# Altium PCB Shank2.0 PCB.PcbDoc
Units mm, origin at the board's own origin, x right, y up, seen from the top; angles counter-clockwise.
Board outline 78.23 x 87 mm, 2 copper layers (Top Layer, Bottom Layer); 81 components, 74 nets, 350 pads, 63 vias.
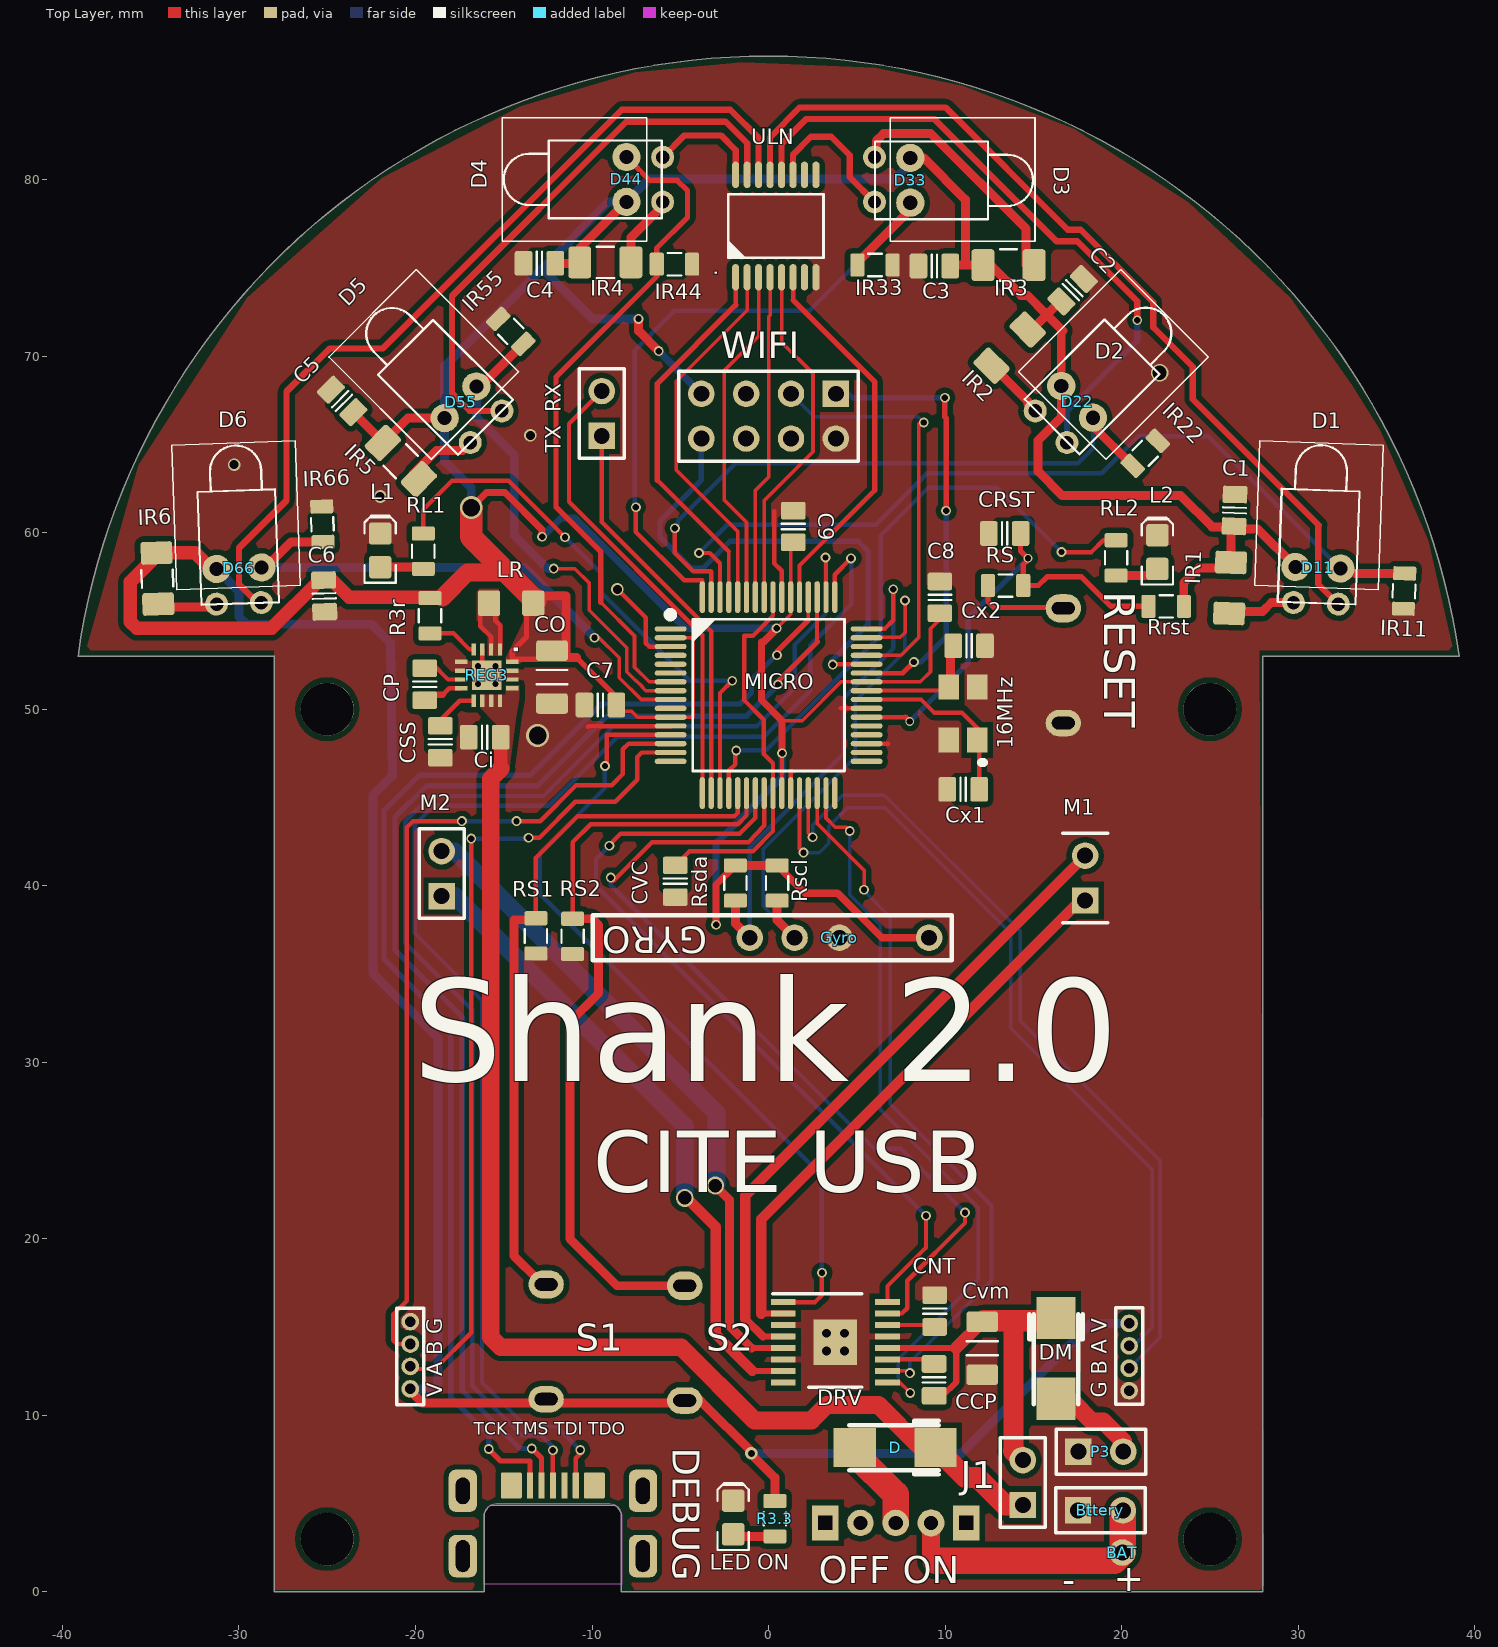
[diagram p0: Top Layer view]
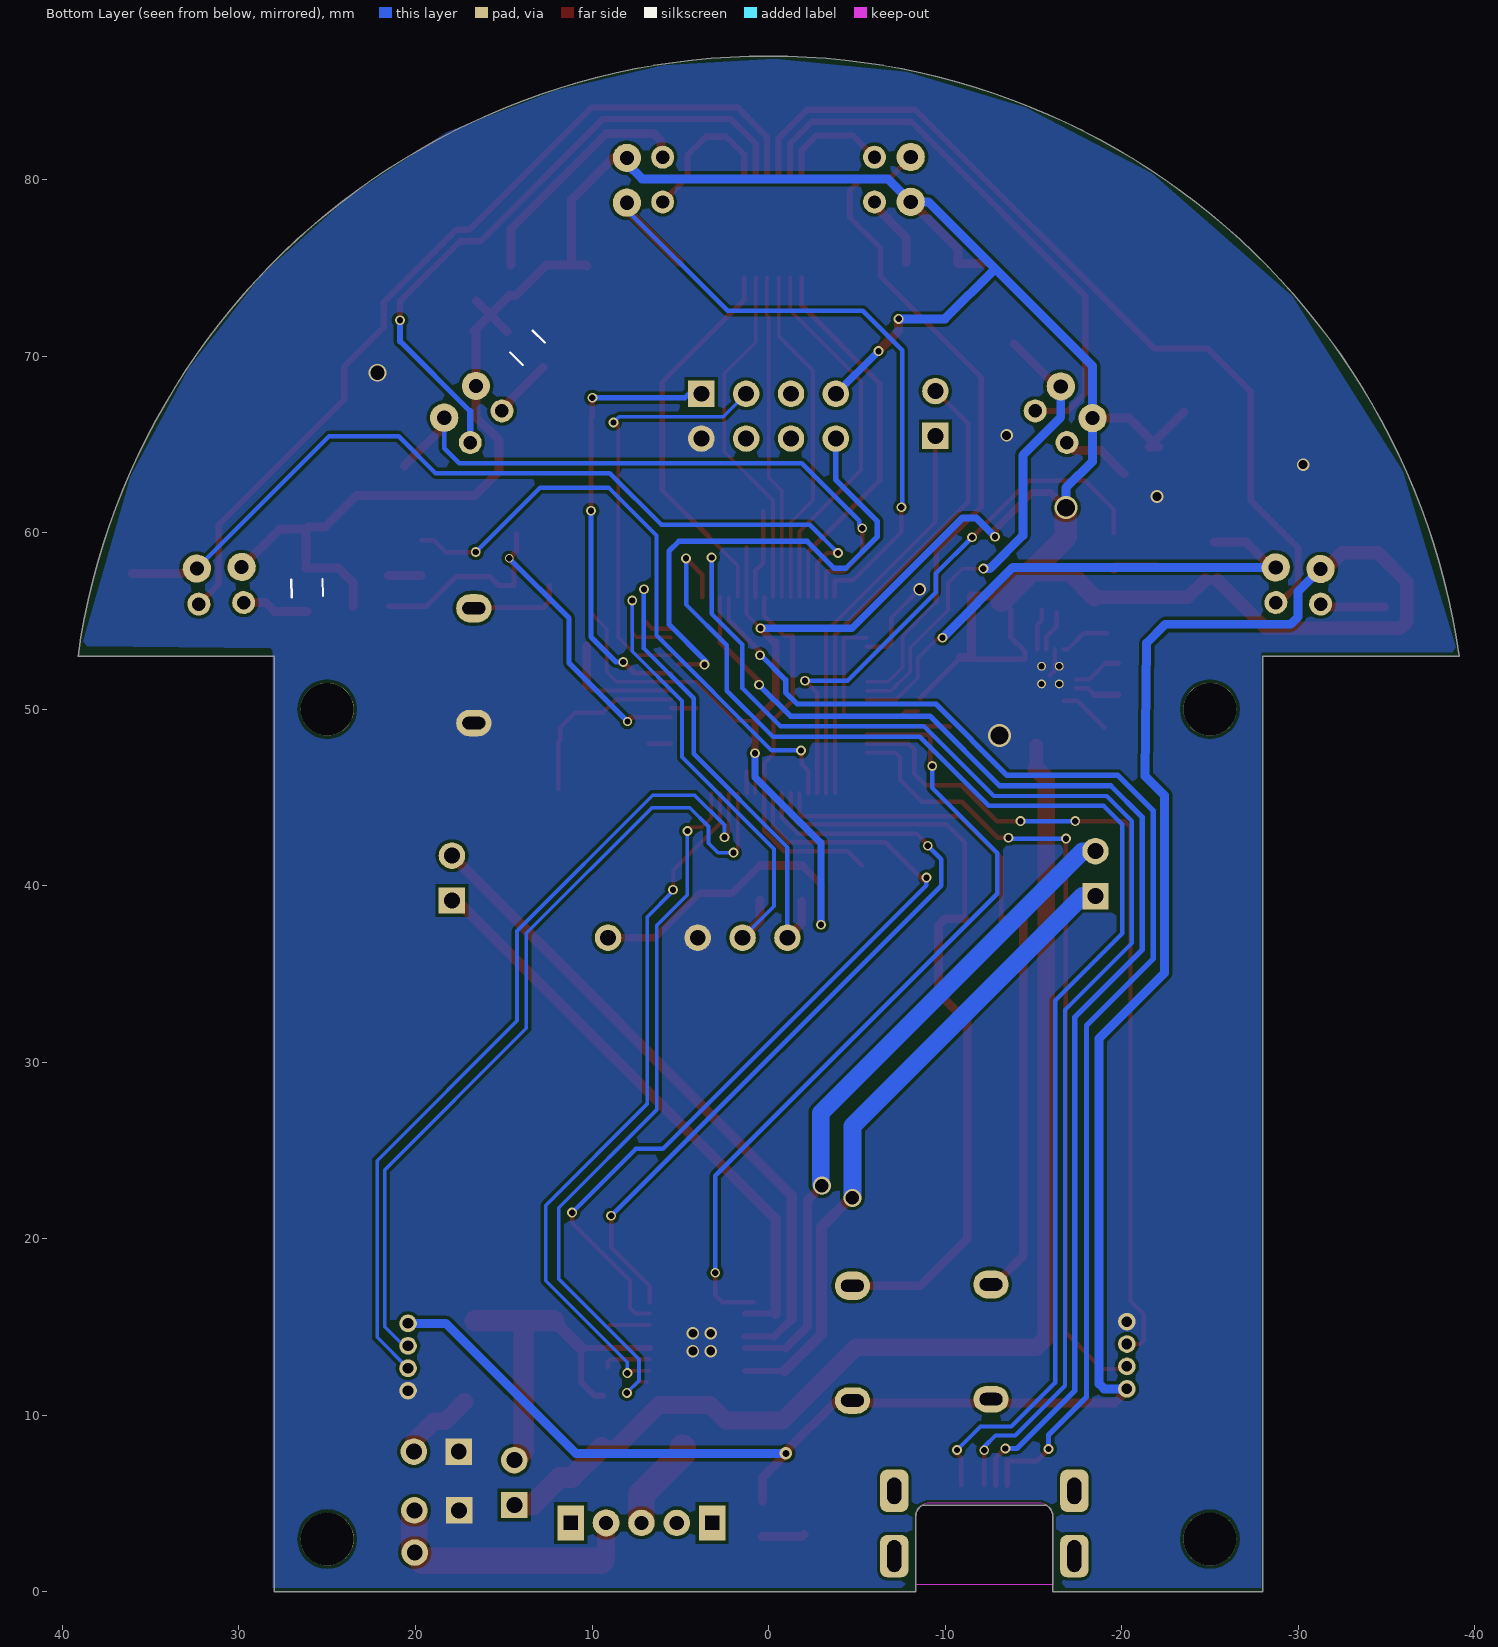
[diagram p1: Bottom Layer view, seen from below]

## Layer stack, top to bottom
Top Solder: solder mask 0.0102, Solder Resist, Dk 3.5
Top Layer: signal copper 0.0356
Dielectric 1: dielectric 0.32, FR-4, Dk 4.8
Bottom Layer: signal copper 0.0356
Bottom Solder: solder mask 0.0102, Solder Resist, Dk 3.5

## Board outline
-28,0 -28,53 -39.1,53 -39.115,53.002 cw(c0,47.5) 39.115,53.002 39.1,53 28,53 28,0 -8.338,0.025 -8.338,4.437 -8.419,4.632 -8.483,4.715 -8.547,4.799 -8.714,4.927 -12.421,4.927 -15.721,4.927 -15.888,4.799 -15.952,4.715 -16.016,4.632 -16.097,4.437 -16.097,0

## Design rules (kind name [scope] priority, off if disabled: settings)
Clearance Clearance_1 [InNamedPolygon('GND TOP')] p1: gap=0.3
Clearance Clearance_Polygon [(InNamedPolygon('GND TOP') AND InPolygon AND InNamedPolygon('GND BOT')) vs InPolygon] p2: gap=0.356
Clearance [All] p3: gap=0.178
ComponentClearance [All] p1 off: gap=0 collisioncheckmode=3 verticalgap=2540 showdistances=FALSE
HoleToHoleClearance [All] p1: gap=0.3 allowstackedmicrovias=TRUE
MinimumSolderMaskSliver [All] p1: minsoldermaskwidth=0
PlaneClearance [All] p1: clearance=1
PlaneConnect [All] p1: planeconnectstyle=Direct reliefexpansion=0.508 reliefentries=4 reliefconductorwidth=0.8 reliefairgap=0.254
PolygonConnect [All] p1: connectstyle=Direct reliefconductorwidth=0.8 reliefentries=4 polygonreliefangle="90 Angle" airgapwidth=0.254
RoutingCorners [All] p1: cornerstyle=Round minsetback=5 maxsetback=2.54
RoutingTopology RoutingTopology_1 [All] p1: topology=Shortest
RoutingVias [All] p1: holewidth=0.6 width=0.8 viastyle="Through Hole" minholewidth=0.254 minwidth=0.381 maxholewidth=1 maxwidth=1.5
SMDNeckDown [All] p1: percent=150.000
SolderMaskExpansion [All] p1: expansion=0.1
Width [All] p1: maxlimit=2.5 minlimit=0.2 preferedwidth=0.3
23 further rules are at their usual default settings.

## Components (designator, comment, footprint, x,y, rotation, side; value= is the part's Value field where it differs from the comment)
16MHz "Component_1" 16Mhz 11.811,48.26 r90 top
BAT "TESTPOINT_LEAD" THP_D46_T80_B80 20.041,2.235 r0 top
Bttery "Header 2" HDR1X2 17.526,4.623 r0 top
C1 "approved sub OK" CAPC2012X135N 26.391,61.265 r268 top
C2 "approved sub OK" CAPC2012X135N 17.221,73.736 r225 top
C3 "approved sub OK" CAPC2012X135N 9.389,75.108 r0 top
C4 "approved sub OK" CAPC2012X135N -12.979,75.26 r0 top
C5 "approved sub OK" CAPC2012X135N -24.155,67.462 r315 top
C6 "approved sub OK" CAPC2012X135N -25.171,56.413 r92 top
C7 "approved sub OK" CAPC2012X135N -9.525,50.241 r0 top
C8 "approved sub OK" CAPC2012X135N 9.703,56.337 r270 top
C9 "approved sub OK" CAPC2012X135N 1.397,60.35 r270 top
CCP "approved sub OK" CAPC2012X135N 9.373,12.014 r270 top
Ci "approved sub OK" CAPC2012X135N -16.078,48.412 r180 top
CNT "approved sub OK" CAPC2012X135N 9.406,15.911 r90 top
CO "22u" CAPC3216X180N -12.268,51.816 r270 top
CP "approved sub OK" CAPC2012X135N -19.474,51.415 r270 top
CRST "approved sub OK" CAPC2012X135N 13.374,59.956 r180 top
CSS "approved sub OK" CAPC2012X135N -18.593,48.158 r270 top
CVC "approved sub OK" CAPC2012X135N -5.283,40.259 r270 top
Cvm "10µ" CAPC3216X175N 12.099,13.803 r270 top (schematic designator CVM)
Cx1 "approved sub OK" CAPC2012X135N 11.024,45.466 r0 top
Cx2 "approved sub OK" CAPC2012X135N 11.354,53.594 r180 top
D "DIODE_SCHOTTKY_10MQ100NPBF" Schottky 4.572,6.909 r0 top
D1 "LED1" LED-v3.0 31,56 r358 top
D2 "LED1" LED-v3.0 16,66 r315 top
D3 "LED1" LED-v3.0 6,80 r270 top
D4 "LED1" LED-v3.0 -6,80 r90 top
D5 "LED1" LED-v3.0 -16,66 r45 top
D6 "LED1" LED-v3.0 -30,56 r2 top
D11 "LED0" LED-1 31.115,58.014 r88 top
D22 "LED0" LED-1 17.475,67.412 r45 top
D33 "LED0" LED-1 8.026,79.959 r0 top
D44 "LED0" LED-1 -8.052,80.01 r180 top
D55 "LED0" LED-1 -17.45,67.386 r135 top
D66 "LED0" LED-1 -29.997,57.988 r92 top
DEBUG "USB Micro Type B (recommended if hand soldering)" USB_Micro-B_FCI_SMD -12.217,0.432 r0 top
DM "Low Ir" Schottky 17.551,10.643 r90 top
DRV "DRV8833PWPR" PWP0016C_N 3.785,14.148 r0 top
"G B A V" "MHDR1X6" "Header Encoder" 20.422,11.405 r90 top
Gyro "Header 8" "Header Gyroscope" 9.093,37.059 r180 top
IR1 "Thick Film" RESC3216N_ZERO 26.137,56.871 r88 top
IR2 "Thick Film" RESC3216N_ZERO 13.653,70.482 r45 top
IR3 "Thick Film" RESC3216X70N 13.589,75.159 r0 top
IR4 "Thick Film" RESC3216X70N -9.246,75.311 r0 top
IR5 "Thick Film" RESC3216X70N -20.828,64.059 r315 top
IR6 "Thick Film" RESC3216X70N -34.62,57.404 r272 top
IR11 "Thick Film" RESC2012X70N 35.992,56.693 r268 top
IR22 "Thick Film" RESC2012X70N 21.336,64.491 r45 top
IR33 "Thick Film" RESC2012X70N 6.026,75.159 r0 top
IR44 "Thick Film" RESC2012X70N -5.334,75.209 r0 top
IR55 "Thick Film" RESC2012X70N -14.605,71.399 r135 top
IR66 "Thick Film" RESC2012X70N -25.273,60.477 r92 top
J1 "Header 2" HDR1X2 14.402,4.928 r90 top
L1 "Red" LED-0805-K -22,59 r90 top
L2 "Red" LED-0805-K 22.022,58.903 r90 top
"LED ON" "Red" LED-0805-K -2.007,4.216 r90 top
LR "470n" INDM2520X190N -14.58,56.007 r0 top
M1 "Header 2" HDR1X2 17.932,39.167 r90 top
M2 "Header 2" HDR1X2 -18.517,39.421 r90 top
MICRO "TM4C123GH6PMT7R" LQFP50P1200X1200X160-64 0,50.8 r0 top
"OFF ON" "Header 3" "SW ON-ON" 3.2,3.912 r0 top
P3 "Header 2" HDR1X2 17.551,7.95 r0 top
R3.3 "Thick Film" RESC2012X70N 0.356,4.152 r270 top
R3r "Thick Film" RESC2012X70N -19.177,55.296 r270 top
REG3 "TPS62091" TPS62091 -15.961,51.935 r270 top
RESET "TS-1143S-WP" "Switche GP" 16.695,49.219 r90 top
RL1 "Thick Film" RESC2012X70N -19.558,58.953 r270 top
RL2 "Thick Film" RESC2012X70N 19.685,58.572 r270 top
Rrst "Thick Film" RESC2012X70N 22.52,55.828 r180 top
RS "Thick Film" RESC2012X70N 13.425,57.004 r0 top
RS1 "Thick Film" RESC2012X70N -13.183,37.16 r90 top
RS2 "Thick Film" RESC2012X70N -11.1,37.135 r270 top
Rscl "Thick Film" RESC2012X70N 0.483,40.157 r270 top
Rsda "Thick Film" RESC2012X70N -1.88,40.157 r270 top
S1 "TS-1143S-WP" "Switche GP" -12.598,10.922 r90 top
S2 "TS-1143S-WP" "Switche GP" -4.75,10.846 r90 top
"TX  RX" "Header 2" HDR1X2 -9.449,65.481 r90 top
ULN "Component_1" TSSOP65P640X120-16N 0.409,77.368 r90 top
"V A B G" "MHDR1X6" "Header Encoder" -20.295,15.316 r270 top
WIFI "Header 4X2" HDR2X4 3.81,67.869 r180 top

## Footprints (in the part's own frame and the unit in brackets; to place one, negate y for a bottom-side part, rotate by r counter-clockwise, add the part's x,y. Pads: shape width x height; smd on the part's side, far side on the other; paste and mask are expansions set on the pad)
16Mhz [mm]
  rect 1.4x1.15 smd: 1(0,0) 2(3,0) 3(3,1.6) 4(0,1.6)
  silkscreen extent -1.27,-0.38 -1.27,-0.25
CAPC2012X135N [mm] "Chip Capacitor, Body 2.0x1.2mm, EIA 0805, IPC Medium Density"
  round 0.254 on Mech15: 0(0,0)
  rrect25% 1x1.4 smd: 1(-0.9,0) 2(0.9,0)
  Top Layer pour cut-out: -0.675,0.7 -0.475,0.9 0.475,0.9 0.675,0.7 0.675,-0.7 0.475,-0.9 -0.475,-0.9 -0.675,-0.7
  silkscreen extent -0.15,-0.65 0.15,0.65, body extent -1.1,-0.72 1.1,0.73, height 1.34
CAPC3216X175N [mm] "Chip Capacitor, Body 3.2x1.6mm, 1.75mm H, EIA 1206, IPC Medium Density"
  round 0.508 on Mech15: 0(0,0)
  rrect25% 1.15x1.8 smd: 1(-1.5,0) 2(1.5,0)
  silkscreen extent -0.4,-0.88 0.4,0.88, body extent -1.7,-0.9 1.7,0.9, height 1.75
CAPC3216X180N [mm] "Chip Capacitor, Body 3.2x1.6mm, 1.8mm H, EIA 1206, IPC Medium Density"
  round 0.508 on Mech15: 0(0,0)
  rrect25% 1.15x1.8 smd: 1(-1.5,0) 2(1.5,0)
  silkscreen extent -0.4,-0.88 0.4,0.88, body extent -1.7,-0.9 1.7,0.9, height 1.8
HDR1X2 [mm] "Connector; Header; 2 Position"
  rect 1.5x1.5 hole 0.9: 1(0,0)
  round 1.5 hole 0.9: 2(2.54,0)
  silkscreen extent -1.27,-1.27 3.81,1.27
HDR2X4 [mm] "Connector; Header; 4x2 Position"
  rect 1.5x1.5 hole 0.9: 1(0,0)
  round 1.5 hole 0.9: 2(0,2.54) 3(2.54,0) 4(2.54,2.54) 5(5.08,0) 6(5.08,2.54) 7(7.62,0) 8(7.62,2.54)
  silkscreen extent -1.27,-1.27 8.89,3.81
"Header Encoder" [mm] "Connector; Header; 6 Position"
  round 1 hole 0.6: 1(0,0) 2(1.27,0) 3(2.54,0) 4(3.81,0)
  silkscreen extent -0.76,-0.76 4.7,0.76
"Header Gyroscope" [mm] "Connector; Header; 8 Position"
  round 1.5 hole 0.9: 1(0,0) 3(5.08,0) 4(7.62,0) 5(10.16,0)
  silkscreen extent -1.27,-1.27 19.05,1.27
INDM2520X190N [mm] "Inductor, molded body 2.5x2.0mm"
  round 0.508 on Mech15: 0(0,0)
  rrect20% 1.25x1.45 smd: 1(-1.25,0) 2(1.25,0)
  Top Layer pour cut-out: -0.7,1 0.7,1 0.7,-1 -0.7,-1
  body extent -1.25,-1 1.25,1, height 1.79
LED-1 [mm] "LED; 2 Leads"
  round 1.6 hole 0.8: 1(0,1.27) 2(0,-1.27)
  silkscreen extent -2,-2.2 6.95,2.2
LED-0805-K [mil]
  round 20 on Mech15: 0(0,0)
  rrect25% 50x50 smd: A(-37.5,0) K(37.5,0)
  Top Layer pour cut-out: -15,30 15,30 15,-30 -15,-30
  silkscreen extent -73,-35 77,35, body extent -39,-25 39,25, height 31
LED-v3.0 [mm] "LED; 2 Leads"
  round 1.3 hole 0.762: 1(-1.27,0) 2(1.27,0)
  silkscreen extent -3.5,0.9 3.5,9.09
LQFP50P1200X1200X160-64 [mm] "Thin Quad Flat Pack, 64 pins, 0.5mm pitch, 12mm lead span, body 10x10mm, 0.1mm body height, max tolerances, IPC Medium Density"
  round 1 on Mech15: 0(0,0)
  oval 1.8x0.3 smd: 1(-5.55,3.75) 2(-5.55,3.25) 3(-5.55,2.75) 4(-5.55,2.25) 5(-5.55,1.75) 6(-5.55,1.25) 7(-5.55,0.75) 8(-5.55,0.25) 9(-5.55,-0.25) 10(-5.55,-0.75) 11(-5.55,-1.25) 12(-5.55,-1.75) 13(-5.55,-2.25) 14(-5.55,-2.75) 15(-5.55,-3.25) 16(-5.55,-3.75) 33(5.55,-3.75) 34(5.55,-3.25) 35(5.55,-2.75) 36(5.55,-2.25) 37(5.55,-1.75) 38(5.55,-1.25) 39(5.55,-0.75) 40(5.55,-0.25) 41(5.55,0.25) 42(5.55,0.75) 43(5.55,1.25) 44(5.55,1.75) 45(5.55,2.25) 46(5.55,2.75) 47(5.55,3.25) 48(5.55,3.75)
  oval 0.3x1.8 smd: 17(-3.75,-5.55) 18(-3.25,-5.55) 19(-2.75,-5.55) 20(-2.25,-5.55) 21(-1.75,-5.55) 22(-1.25,-5.55) 23(-0.75,-5.55) 24(-0.25,-5.55) 25(0.25,-5.55) 26(0.75,-5.55) 27(1.25,-5.55) 28(1.75,-5.55) 29(2.25,-5.55) 30(2.75,-5.55) 31(3.25,-5.55) 32(3.75,-5.55) 49(3.75,5.55) 50(3.25,5.55) 51(2.75,5.55) 52(2.25,5.55) 53(1.75,5.55) 54(1.25,5.55) 55(0.75,5.55) 56(0.25,5.55) 57(-0.25,5.55) 58(-0.75,5.55) 59(-1.25,5.55) 60(-1.75,5.55) 61(-2.25,5.55) 62(-2.75,5.55) 63(-3.25,5.55) 64(-3.75,5.55)
  silkscreen extent -5.75,-4.3 4.3,4.75, body extent -6.1,-6.1 6.1,6.1, height 1.59
PWP0016C_N [mm]
  rect 1.4x0.35 smd paste+0 mask+0.051: 1(-2.95,2.275) 2(-2.95,1.625) 3(-2.95,0.975) 4(-2.95,0.325) 5(-2.95,-0.325) 6(-2.95,-0.975) 7(-2.95,-1.625) 8(-2.95,-2.275) 9(2.95,-2.275) 10(2.95,-1.625) 11(2.95,-0.975) 12(2.95,-0.325) 13(2.95,0.325) 14(2.95,0.975) 15(2.95,1.625) 16(2.95,2.275)
  rect 2.46x2.56 smd paste+0 mask+0.051: 17(0,0)
  silkscreen extent -3.55,-2.55 1.5,2.75
RESC2012X70N [mm] "Chip Resistor, Body 2.0x1.2mm, EIA 0805, IPC Medium Density"
  round 0.254 on Mech15: 0(0,0)
  rrect25% 0.8x1.3 smd: 1(-1,0) 2(1,0)
  Top Layer pour cut-out: -0.725,0.65 -0.525,0.85 0.525,0.85 0.725,0.65 0.725,-0.65 0.525,-0.85 -0.525,-0.85 -0.725,-0.65
  silkscreen extent -0.38,-0.64 0.38,0.64, body extent -1.1,-0.67 1.1,0.68, height 0.69
RESC3216N_ZERO [mm] "Chip Resistor, Body 3.2x1.6mm, 1206, IPC Medium Density"
  round 0.508 on Mech15: 0(0,0)
  rrect25% 1.3x1.8 smd: 1(1.45,0) 2(-1.45,0)
  body extent -1.63,-0.82 1.62,0.83, height 0.69
RESC3216X70N [mm] "Chip Resistor, Body 3.2x1.6mm, EIA 1206, IPC Medium Density"
  round 0.508 on Mech15: 0(0,0)
  rrect25% 1.3x1.8 smd: 1(-1.45,0) 2(1.45,0)
  silkscreen extent -0.51,-0.89 0.51,0.89, body extent -1.62,-0.82 1.63,0.83, height 0.69
Schottky [mm] "JEDEC DO214 variation AC. SMA"
  rect 2.4x2.2 smd: A(0.3,1.27) K(4.88,1.27)
  silkscreen extent 0,-0.25 5.08,2.79
"SW ON-ON" [mm] "Connector; Header; 3 Position"
  round 1.5 hole 0.8: 1(2,0) 2(4,0)
  round 1.524 hole 0.8: 3(6,0)
  rect 1.5x2 hole 0.8 square: GND(0,0) GND(8,0)
"Switche GP" [mm]
  oval 1.5x2 hole 0.7 slot 1.3 at 90 deg: 1(0,0)
  oval 1.6x2 hole 0.7 slot 1.3 at 90 deg: 2(6.5,0)
THP_D46_T80_B80 [mm]
  round 1.5 hole 0.9: 1(0,0)
TPS62091 [mm]
  rect 0.7x0.25 smd mask+0.07: 1(-1.45,0.75) 2(-1.45,0.24) 3(-1.45,-0.25) 4(-1.45,-0.75) 9(1.45,-0.75) 10(1.45,-0.25) 11(1.45,0.25) 12(1.45,0.75)
  round 0.5 hole 0.35: 3(0.5,-0.5) 14(-0.5,0.5) 14(-0.5,-0.5) 14(0.5,0.5)
  rect 0.25x0.7 smd mask+0.07: 5(-0.75,-1.45) 6(-0.25,-1.45) 7(0.25,-1.45) 8(0.75,-1.45) 13(0.75,1.45) 14(0.25,1.45) 15(-0.25,1.45) 16(-0.75,1.45)
  rect 1.68x1.68 smd mask+0.07: 14(0,0)
TSSOP65P640X120-16N [mm] "TSSOP, 16 Leads, Body 5.1x4.5mm (max), Pitch 0.65mm, IPC Medium Density"
  round 0.508 on Mech15: 0(0,0)
  oval 1.5x0.4 smd paste-0.051: 1(-2.9,2.275) 2(-2.9,1.625) 3(-2.9,0.975) 4(-2.9,0.325) 5(-2.9,-0.325) 6(-2.9,-0.975) 7(-2.9,-1.625) 8(-2.9,-2.275) 9(2.9,-2.275) 10(2.9,-1.625) 11(2.9,-0.975) 12(2.9,-0.325) 13(2.9,0.325) 14(2.9,0.975) 15(2.9,1.625) 16(2.9,2.275)
  silkscreen extent -1.8,-2.7 1.8,2.7, body extent -3.25,-2.55 3.25,2.55, height 1.2
USB_Micro-B_FCI_SMD [mm]
  round 0.508 on Mech15: 0(0,0)
  rrect20% 0.35x1.5 smd: 1(-1.3,5.6) 2(-0.65,5.6) 3(0,5.6) 4(0.65,5.6) 5(1.3,5.6)
  rrect50% 1.6x2.4 hole 0.8 slot 1.8 at 90 deg: SH(-5.1,1.6) SH(5.1,1.6)
  rrect50% 1.6x2.4 hole 0.8 slot 1.5 at 90 deg: SH(-5.1,5.3) SH(5.1,5.3)
  rrect20% 1.2x1.5 smd: SH(-2.35,5.6) SH(2.35,5.6)
  Keep-Out Layer board cut-out: -3.9,0 -3.9,3.797 -3.839,4.103 -3.666,4.362 -3.406,4.536 -3.1,4.597 -3.1,4.597 3.1,4.597 3.406,4.536 3.666,4.362 3.839,4.103 3.9,3.797 3.9,3.797 3.9,0
  body extent -5.35,-21.58 5.35,5.8, height 4.67

## Part data
BAT: "TEST POINT"
Bttery J1 M1 M2 P3 "TX  RX": "Header, 2-Pin"
C1 C2 C3 C4 C5 C6 C7 C8 C9 Ci CP CSS CVC Cx1 Cx2: library part CAPC_10u_0805_10V, "Capacitor SMD Cer 10uF 10% 10V X5R 0805"
CCP CRST: library part CAPC_1u_0805_X7R_16V_10%, "Capacitor SMD Cer 1uF 10% 16V X7R 0805"
CNT: library part CAPC_2u2_0805, "Capacitor SMD Cer 2.2uF 10% 16V X7R 0805"
CO: library part CAPC_100n_1206_NP0_50V_5%, "Capacitor SMD Cer 100nF 1206 NP0 50V 5%"
Cvm: library part CAPT_10u_6032_16V, "Capacitor SMD Tantalum 10uF 20% 16V EIA 6032-28"
D: "Diode Schottky SMD 100V 2A SMA"
D1 D2 D3 D4 D5 D6: "Typical RED GaAs LED"
D11 D22 D33 D44 D55 D66: "Typical INFRARED GaAs LED"
DEBUG: library part USB_Micro_TypeB_FCI, "Connector SMD-THD USB Micro Type B middle mount"
DM: library part DIODE_SCHOTTKY_40V_30mA_SOD-523F, "Diode Schottky SMD 40V 30mA SOD-523F"
DRV MICRO: "Imported"
"G B A V" "V A B G": "Header, 6-Pin"
Gyro: "Header, 8-Pin"
IR1 IR2 IR3 IR4 IR5 IR6 IR11 IR22 IR33 IR44 IR55 IR66 R3.3 R3r RL1 RL2 Rscl Rsda: library part RES_2K2_0805_1%, "Resistor SMD chip 2.2k Ohm 0.125W 1% 0805"
L1 L2 "LED ON": library part LED_SMD_Red_0805_6mcd, "LED 0805 SMD Red 6mcd 621nm"
LR: library part INDC_150n_1008, "Inductor SMD chip 150nH 1008"
"OFF ON": "Header, 3-Pin"
RESET S1 S2: library part SW_SMD_PB_4.3mm, "Switch SMD Tact 4.3mm Stem"
Rrst RS: library part RES_205K_0805_1%, "Resistor SMD chip 205k Ohm 0.125W 1% 0805"
RS1 RS2: library part RES_1K5_0805_1%, "Resistor SMD chip 1.5k Ohm 0.125W 1% 0805"
WIFI: "Header, 4-Pin, Dual row"

## Free pads (board coordinates)
  round 3 hole 3 unplated paste+0 mask+0: 1(-25,3) 1(-25,50) 1(25,3) 1(25,50)

## Via types
v1: diameter 0.559, hole 0.356, Top Layer to Bottom Layer, 47 vias
v2: diameter 0.711, hole 0.508, Top Layer to Bottom Layer, 8 vias
v3: diameter 0.5, hole 0.35, Top Layer to Bottom Layer, 2 vias
v4: diameter 1.016, hole 0.762, Top Layer to Bottom Layer, 2 vias
v5: diameter 1.3, hole 1, Top Layer to Bottom Layer, 2 vias
v6: diameter 0.7, hole 0.4, Top Layer to Bottom Layer, 1 vias
v7: diameter 1, hole 0.8, Top Layer to Bottom Layer, 1 vias

## Nets (pads, with @x,y where several pads share a name; then routed paths per layer and width w, separated by ;. In a path a pad name is that pad's centre, name@x,y a point inside that pad or via, vN(x,y) a via of type N, cw(c..) or ccw(c..) an arc to the next point about the centre after c; other vN are vias at no path point)
3.3V: "G B A V.4" "V A B G.4" C1.2 C2.2 C3.2 C4.2 C5.2 C6.2 C7.2 C8.2 C9.2 CO.1 D11.1 D22.1 D33.1 D44.1 D55.1 D66.1 Gyro.1 IR1.1 IR2.1 IR3.1 IR4.1 IR5.1 IR6.1 LR.2 MICRO.2 MICRO.11 MICRO.26 MICRO.42 MICRO.54 R3.3.1 R3r.1 REG3.16 Rrst.1 Rscl.1 Rsda.1 S1.1 S2.1 WIFI.7 | length 365.8
  Top Layer w0.203: C7.2@-8.484,49.897 -7.773,49.897 -7.426,49.55 MICRO.11 -4.267,49.55 -4.267,54.05 MICRO.2 ; S2.1@-4.902,10.693 S2.1 S2.1@-3.861,10.846 ; v1(0.457,54.585) 1.25,55.377 MICRO.54 C9.2@1.25,59.187 ; MICRO.26 0.75,46.321 ; 0.767,49.347 1.9,49.347 4.103,51.55 MICRO.42 8.599,51.55 9.169,52.121 9.169,54.559 9.924,55.314 C8.2@9.901,55.338
  Top Layer w0.229: 0.75,46.321 0.75,47.524 v1(0.767,47.507)
  Top Layer w0.3: LR.2@-13.71,55.627 -13.71,54.096 -14.511,53.295 -14.511,52.836 -11.12,52.836
  Top Layer w0.305: -10.871,52.934 C7.2@-8.598,50.66
  Top Layer w0.406: v5(-16.842,61.419) -15.979,62.281 -14.935,62.281 -12.827,60.172 v1(-12.827,59.769) ; v1(-2.972,37.795) -2.972,40.065 Rsda.1 ; -0.403,53.8 -0.403,50.517 0.767,49.347 v1(0.767,47.507) ; -0.299,53.8 0.486,54.585 v1(0.457,54.585) ; Rscl.1 2.067,39.573 3.912,39.573 6.426,37.059 Gyro.1
  Top Layer w0.5: Rrst.1 23.52,57.164
  Top Layer w0.508: C6.2@-25.426,57.313 C6.2 C6.2@-24.725,57.313 ; C5.2 -21.535,64.842 -22.082,64.842 -20.435,66.488 D55.1 ; -20.126,11.227 -19.593,10.693 S2.1@-4.902,10.693 ; LR.2 -13.205,56.131 -12.923,56.413 -11.481,56.413 -11.481,52.934 -10.871,52.934 ; C4.2 -10.719,75.26 -10.719,76.073 D44.1 ; v1(-7.366,72.111) -7.366,71.425 v1(-6.223,70.282) ; S2.1@-3.861,10.846 -0.864,7.849 -0.864,7.696 0.356,6.477 R3.3.1 ; Rsda.1 Rscl.1 ; D33.1 8.788,81.229 11.151,78.867 11.151,75.224 11.085,75.159 ; C3.2 10.34,75.159 11.085,75.159 ; IR2.1@14.818,71.409 15.761,72.352 ; C2.2@16.547,73.138 15.761,72.352 ; D22.1@16.577,69.013 D22.1 ; 23.52,57.164 24.344,57.988 IR1.1@26.213,57.988 ; IR1.1@26.197,58.32 C1.2@26.197,60.203 ; D11.1 27.701,60.203 C1.2@26.197,60.203 ; 11.085,75.159 12.589,75.159 14.3,73.447 14.665,73.447 15.761,72.352 ; 15.761,72.352 16.675,71.438 16.577,71.34 D22.1 ; D22.1 16.577,66.539 15.265,65.227 15.265,63.475 16.637,62.103 23.343,62.103 25.121,60.325 26.075,60.325 C1.2@26.197,60.203
  Top Layer w0.762: D66.1@-31.417,57.794 -32.475,58.852 -34.519,58.852 -36.144,57.226 -36.144,54.94 -35.789,54.585 -28.154,54.585 C6.2@-25.426,57.313 ; C6.2@-24.725,57.313 -23.749,56.337 -18.466,56.337
  Top Layer w1.016: -18.466,56.337 -17.064,57.739 -14.666,57.739
  Top Layer w1.27: v5(-16.842,61.419) -16.842,59.768 LR.2@-13.205,56.131
  Bottom Layer w0.203: -2.972,42.443 -2.957,42.428
  Bottom Layer w0.406: v1(-12.827,59.769) -12.824,59.769 -11.76,60.833 -10.973,60.833 -4.724,54.585 v1(0.457,54.585) ; v1(-6.223,70.282) WIFI.7 ; v1(-2.972,37.795) -2.972,42.443 ; -2.957,42.428 0.767,46.152 v1(0.767,47.507)
  Bottom Layer w0.508: D66.1 -29.997,56.675 -29.997,55.245 -29.566,54.813 -22.479,54.813 -21.418,53.752 -21.311,46.228 -22.416,45.124 -22.416,35.05 -18.72,31.354 -18.72,11.793 -19.006,11.506 -20.295,11.506 ; v5(-16.842,61.419) -16.842,62.536 -18.348,64.042 D55.1 -18.348,69.435 -12.827,74.955 ; v1(-7.366,72.111) -9.982,72.111 -12.827,74.955 ; v6(-0.974,7.849) 10.922,7.849 18.288,15.215 20.422,15.215 ; D33.1 8.026,80.899 7.163,80.035 -6.756,80.035 D44.1 -9.042,78.74 -12.827,74.955
ADC1: D11.2 IR11.1 MICRO.62 | length 49.3
  Top Layer w0.25: v1(-3.937,58.852) -3.327,58.852 -2.75,58.274 MICRO.62 ; D11.2 32.963,57.969 33.24,57.692
  Top Layer w0.5: 33.24,57.692 IR11.1
  Bottom Layer w0.25: v1(-3.937,58.852) -2.337,60.452 6.071,60.452 8.992,63.373 18.872,63.373 20.955,65.456 24.898,65.456 D11.2
ADC2: D22.2 IR22.1 MICRO.63 | length 36.4
  Top Layer w0.25: v1(-5.309,60.249) -5.309,58.852 -4.267,57.81 -3.276,57.81 -3.25,57.784 MICRO.63 ; D22.2@18.373,66.039 D22.2
  Top Layer w0.5: D22.2@18.373,66.039 IR22.1
  Bottom Layer w0.25: v1(-5.309,60.249) -5.131,60.427 -5.131,60.681 -1.88,63.932 17.526,63.932 18.373,64.779 D22.2
ADC3: D33.2 IR33.1 MICRO.64 | length 39.9
  Top Layer w0.25: v1(-7.518,61.443) -7.518,60.046 -4.775,57.302 -3.759,57.302 MICRO.64@-3.759,56.359 ; D33.2@8.026,78.283 D33.2
  Top Layer w0.5: IR33.1@5.08,75.336 D33.2@8.026,78.283
  Bottom Layer w0.25: v1@-7.569,61.493 -7.569,70.333 -5.334,72.568 2.311,72.568 8.026,78.283 D33.2
ADC4: D44.2 IR44.1 MICRO.7 | length 38.5
  Top Layer w0.203: -9.5,56.058 -7.595,54.153 -7.595,52.384 -6.761,51.55 MICRO.7
  Top Layer w0.3: -9.5,56.058 -9.5,58.908 -12.04,61.448 -12.04,68.809 -6.334,74.514 IR44.1 -6.334,76.114 -4.597,77.851 -4.597,79.375 -5.182,79.959 -6.731,79.959 D44.2
ADC5: D55.2 IR55.1 MICRO.8 | length 27.2
  Top Layer w0.203: v1(-12.167,57.963) -10.973,57.963 -10.16,57.15 -10.16,55.611 -8.026,53.477 -8.026,52.121 -7.518,51.613 -7.49,51.613 -7.163,51.285 -7.163,51.257 -6.956,51.05 MICRO.8
  Top Layer w0.25: D55.2 D55.2@-16.306,68.284
  Top Layer w0.5: D55.2@-16.306,68.284 IR55.1
  Bottom Layer w0.5: D55.2 -16.552,66.539 -14.402,64.389 -14.402,59.842 -12.522,57.963 v1(-12.167,57.963)
ADC6: D66.2 IR66.1 MICRO.9 | length 31
  Top Layer w0.203: v1(-9.855,54.051) -9.601,54.051 -8.458,52.908 -8.458,51.791 -7.218,50.55 MICRO.9
  Top Layer w0.25: D66.2 D66.2@-28.48,58.033
  Top Layer w0.5: D66.2@-28.48,58.033 -27.034,59.478 IR66.1
  Bottom Layer w0.5: D66.2 -13.837,58.033 v1(-9.855,54.051)
AIN1: DRV.16 MICRO.23 | length 44.9
  Top Layer w0.25: -8.839,42.494 -8.375,42.959 -2.02,42.959 -2.017,42.955 -1.637,42.955 -0.75,43.842 MICRO.23 ; DRV.16 6.735,17.326 8.915,19.507 v1(8.915,21.311)
  Bottom Layer w0.25: v1(-9.017,42.266) -9.777,41.506 -9.777,40.003 v1(8.915,21.311)
AIN2: DRV.15 MICRO.24 | length 47.9
  Top Layer w0.25: v1@-8.788,40.284 -6.604,42.469 -1.14,42.469 -0.25,43.415 MICRO.24 ; DRV.15 7.543,15.773 7.847,16.077 7.847,17.626 11.125,20.904 v1(11.125,21.488)
  Bottom Layer w0.25: v1(-8.941,40.462) -8.941,40.03 5.994,25.095 7.518,25.095 v1(11.125,21.488)
BIN1: DRV.9 MICRO.31 | length 41.2
  Top Layer w0.203: MICRO.31 3.25,43.835 3.778,43.307 4.394,43.307 ; DRV.9@6.883,11.913 7.391,11.913 v1(8.026,11.278)
  Bottom Layer w0.203: v1(4.597,43.104) 4.597,39.497 6.325,37.77 6.325,27.33 11.887,21.768 11.887,17.729 7.341,13.183 7.341,11.963 v1(8.026,11.278)
BIN2: DRV.10 MICRO.30 | length 40.2
  Top Layer w0.203: MICRO.30 2.75,43.529 5.41,40.869 v1(5.41,39.776) ; DRV.10 7.772,12.523 7.95,12.344 v1(8.001,12.395)
  Bottom Layer w0.203: v1(5.41,39.776) 5.41,39.7 6.883,38.227 6.883,27.635 12.624,21.895 12.624,17.628 8.001,13.005 v1(8.001,12.395)
CH_PD: MICRO.45 WIFI.3 | length 24.1
  Top Layer w0.203: MICRO.45 7.495,53.05 8.509,54.064 8.509,66.167 8.585,66.243 v1(8.788,66.243)
  Bottom Layer w0.203: WIFI.3 2.576,66.563 8.468,66.563 v1(8.788,66.243) v1@8.839,66.294
GND: 16MHz.2 16MHz.4 "G B A V.1" "LED ON.K" "V A B G.1" Bttery.1 C1.1 C2.1 C3.1 C4.1 C5.1 C6.1 C7.1 C8.1 C9.1 Ci.2 CNT.2 CO.2 CRST.2 CSS.2 CVC.2 Cvm.2 Cx1.1 Cx2.1 DRV.3 DRV.6 DRV.13 DRV.17 Gyro.3 IR11.2 IR22.2 IR33.2 IR44.2 IR55.2 IR66.2 L1.K L2.K MICRO.3 MICRO.12 MICRO.27 MICRO.35 MICRO.39 MICRO.55 P3.1 REG3.3 REG3.5 REG3.6 REG3.14 REG3.15 RESET.1 RS1.1 RS2.2 ULN.8 WIFI.2 | length 20.4
  Top Layer w0.254: REG3.3@-16.211,53.385 -16.211,52.185 REG3.14@-15.961,51.935 ; -10.249,49.015 -10.214,49.05 MICRO.12 ; v2(-8.56,56.794) -6.96,55.194 -6.96,53.746 -6.763,53.55 MICRO.3 ; 0.31,61.217 0.31,58.276 0.75,57.836 MICRO.55 ; MICRO.27 1.25,46.474 ; 4.098,50.05 MICRO.39 ; MICRO.35 6.777,48.05
  other v2: 3.277,13.64 4.293,13.64 3.277,14.656 4.293,14.656 -22,62.049 -30.277,63.856 -13.487,65.507
  other v5: -13.081,48.514
  other v7: 22.149,69.063
IR1: MICRO.58 ULN.4 | length 18.5
  Top Layer w0.203: MICRO.58 -0.75,62.394 0,63.144 0,72.212 0.102,72.314 0.102,74.451 ULN.4
IR2: MICRO.57 ULN.5 | length 20
  Top Layer w0.203: MICRO.57 -0.25,61.828 2.515,64.592 2.515,69.012 0.734,70.792 ULN.5
IR3: MICRO.53 ULN.6 | length 21.8
  Top Layer w0.203: MICRO.53 1.75,58.138
  Top Layer w0.229: 1.75,58.138 3.404,59.792
  Top Layer w0.254: 1.384,73.176 ULN.6
  Top Layer w0.279: 3.404,59.792 6.022,62.41
  Top Layer w0.3: 1.384,73.176 6.022,68.539 6.022,62.41
IR4: MICRO.61 ULN.1 | length 21.6
  Top Layer w0.203: MICRO.61 -2.25,58.917
  Top Layer w0.241: -6.299,62.967 -2.25,58.917
  Top Layer w0.254: -1.866,72.886 ULN.1
  Top Layer w0.3: -6.299,62.967 -6.299,68.453 -1.866,72.886
IR5: MICRO.60 ULN.2 | length 21.2
  Top Layer w0.203: MICRO.60 -1.75,60.068 -5.232,63.551 -5.232,68.58 -1.216,72.597 ULN.2
IR6: MICRO.59 ULN.3 | length 19.4
  Top Layer w0.203: MICRO.59 -1.25,60.584 -2.515,61.849 -2.515,69.19 -0.566,71.138 ULN.3
L1: MICRO.19 RL1.1 | length 31.5
  Top Layer w0.25: RL1.1 -19.558,61.316 -17.932,62.941 -14.732,62.941 v1(-11.532,59.741) ; MICRO.19 -2.75,50.92 v1(-2.057,51.613)
  Bottom Layer w0.25: v1(-11.532,59.741) -9.474,57.683 -9.474,56.617 -4.47,51.613 v1(-2.057,51.613)
L2: MICRO.20 RL2.1 | length 35.5
  Top Layer w0.25: MICRO.20 -2.25,46.518 -1.88,46.888 -1.88,47.718 v1(-1.83,47.669) ; v1(16.586,58.903) 18.292,58.903 18.962,59.572 RL2.1
  Bottom Layer w0.25: v1(-1.83,47.669) -0.168,47.669 6.35,54.187 6.35,59.842 9.063,62.555 12.934,62.555 v1(16.586,58.903)
LED_E1: D1.2 ULN.13 | length 50.6
  Top Layer w0.356: ULN.13 0.084,82.409 1.761,84.086 10.019,84.086 16.939,77.165 17.678,77.165 21.793,73.05 21.793,71.628 24.028,69.393 24.028,67.564 31.166,60.427 31.14,60.401 31.14,57.084 D1.2
LED_E2: D2.2 ULN.12 | length 36.4
  Top Layer w0.356: ULN.12 0.734,82.034 2.131,83.431 9.381,83.431 16.307,76.505 17.475,76.505 20.878,73.102 v1(20.878,72.035)
  Bottom Layer w0.305: 16.898,66.871 20.878,70.851
  Bottom Layer w0.356: D2.2 16.898,66.871 ; 20.878,70.851 v1(20.878,72.035)
LED_E3: D3.2 ULN.11 | length 8.4
  Top Layer w0.356: ULN.11 1.384,81.415 2.399,82.43 3.547,82.43 4.597,81.379 4.597,80.133 D3.2
LED_E4: D4.2 ULN.16 | length 6.4
  Top Layer w0.356: D4.2 -4.771,82.499 -2.692,82.499 -1.866,81.673 ULN.16
LED_E5: D5.2 ULN.15 | length 31.8
  Top Layer w0.356: D5.2 -16.936,66.898 -17.932,67.894 -17.932,73.406 -8.069,83.269 -2.435,83.269 -1.216,82.05 ULN.15
LED_E6: D6.2 ULN.14 | length 49.8
  Top Layer w0.254: D6.2@-28.968,56.044 D6.2
  Top Layer w0.356: D6.2@-28.968,56.044 -29.997,57.074 -29.997,59.131 -27.305,61.824 -27.305,67.996 -24.867,70.434 -21.844,70.434 -8.315,83.963 -2.175,83.963 -0.566,82.354 ULN.14
NetBAT_1: "OFF ON.3" BAT.1 Bttery.2 | length 15.4
  Top Layer w0.508: BAT.1 BAT.1@20.066,2.261
  Top Layer w1.016: 9.2,3.912 9.2,2.052 9.474,1.778
  Top Layer w1.5: 9.474,1.778 19.583,1.778 BAT.1 ; BAT.1@20.066,2.261 Bttery.2
NetCCP_1: CCP.1 DRV.11 | length 2.7
  Top Layer w0.25: DRV.11 8.976,13.173 9.108,13.041 CCP.1@9.108,12.725
NetCNT_1: CNT.1 DRV.14 | length 2.2
  Top Layer w0.25: DRV.14 CNT.1@8.981,15.123
NetCP_1: CP.1 REG3.7 | length 2.8
  Top Layer w0.254: CP.1@-19.086,52.614 -18.157,51.685 REG3.7
  Top Layer w0.305: CP.1@-19.812,52.614 CP.1@-19.086,52.614
NetCP_2: CP.2 REG3.8 | length 2.6
  Top Layer w0.254: -18.451,50.814 -18.081,51.185 REG3.8
  Top Layer w0.356: CP.2@-19.812,50.814 -18.451,50.814
NetCRST_1: CRST.1 MICRO.38 Rrst.2 RS.2 | length 25.8
  Top Layer w0.254: MICRO.38 7.757,49.55
  Top Layer w0.3: 7.757,49.55 v3(7.998,49.309) ; CRST.1 14.274,58.964 v3(14.689,58.549) 14.689,58.45 14.425,58.186 RS.2 15.274,57.004 15.767,57.496 17.723,57.496 19.392,55.828 Rrst.2
  Bottom Layer w0.3: v3(7.998,49.309) 11.306,52.617 11.306,55.166 v3(14.689,58.549)
NetCSS_1: CSS.1 REG3.9 | length 2.9
  Top Layer w0.254: CSS.1@-19.014,48.957 -17.486,50.485 REG3.9
NetCVC_1: CVC.1 MICRO.25 MICRO.56 | length 21.2
  Top Layer w0.25: CVC.1 -4.481,41.961 -0.889,41.961 0.25,43.1 MICRO.25 0.25,46.935 -0.279,47.465 -0.279,49.403 -1.37,50.493 -1.37,54.153 -0.898,54.153 0.25,55.3 MICRO.56
NetD1_1: D1.1 IR1.2 | length 3.8
  Top Layer w0.5: IR1.2@26.127,55.541 27.982,55.541 28.485,56.044 D1.1
NetD2_1: D2.1 IR2.2 | length 3.4
  Top Layer w0.508: IR2.2@12.767,69.358 14.707,67.418 14.707,67.293 D2.1
NetD3_1: D3.1 IR3.2 | length 13.9
  Top Layer w0.5: D3.1 6.096,81.366 6.096,82.194 6.514,82.613 9.183,82.613 14.589,77.207 IR3.2@14.589,75.159
NetD4_1: D4.1 IR4.2 | length 4.2
  Top Layer w0.508: IR4.2@-7.798,75.311 -7.798,76.708 -6,78.506 D4.1
NetD5_1: D5.1 IR5.2 | length 3.9
  Top Layer w0.508: IR5.2@-20.121,63.352 -18.804,64.668 -17.332,64.668 D5.1
NetD6_1: D6.1 IR6.2 | length 3.5
  Top Layer w0.508: IR6.2@-34.89,55.795 D6.1@-31.43,55.795
NetD_A: "OFF ON.2" D.A | length 5.2
  Top Layer w1.5: D.A 4.872,7.853 7.2,5.525 7.2,3.912
NetDM_A: DM.A P3.2 | length 4.4
  Top Layer w1: DM.A@17.221,10.77 18.313,9.677 18.948,9.677 20.091,8.534 P3.2
NetDRV_2: DRV.2 M1.1 | length 32.6
  Top Layer w0.356: -0.406,15.773 DRV.2@1.316,15.773
  Top Layer w0.6: -0.406,15.773 -0.406,21.107 M1.1@17.628,39.141
NetDRV_4: DRV.4 M1.2 | length 37.3
  Top Layer w0.356: -0.325,14.473 DRV.4@1.35,14.473
  Top Layer w0.457: -1.321,15.469 -0.325,14.473
  Top Layer w0.6: -1.321,15.469 -1.321,22.454 M1.2
NetDRV_5: DRV.5 M2.2 | length 38.2
  Top Layer w0.356: -0.97,13.823 DRV.5@1.33,13.823
  Top Layer w0.5: v4(-3.023,23.012) -2.21,22.2 -2.21,15.062 -0.97,13.823
  Bottom Layer w1: M2.2 -17.78,41.961 -2.946,27.127 -2.946,23.089 v4(-3.023,23.012)
NetDRV_7: DRV.7 M2.1 | length 36.8
  Top Layer w0.356: -0.915,12.523 DRV.7@1.292,12.523
  Top Layer w0.6: v4@-4.648,22.327 -2.997,20.676 -2.997,14.605 -0.915,12.523
  Bottom Layer w1: M2.1 -17.78,39.421 -4.75,26.391 v4(-4.75,22.327)
NetL1_A: L1.A RL1.2 | length 2.5
  Top Layer w0.508: L1.A -19.652,58.047 RL1.2
NetL2_A: L2.A RL2.2 | length 1.8
  Top Layer w0.508: RL2.2 L2.A@21.525,57.572
"NetLED ON_A": "LED ON.A" R3.3.2 | length 2.4
  Top Layer w0.508: -2.007,3.264 -1.895,3.152 R3.3.2
NetLR_1: LR.1 REG3.1 REG3.2 | length 4.7
  Top Layer w0.254: LR.1@-16.33,55.507 -16.33,54.709 -15.721,54.1 REG3.2 ; LR.1@-15.469,55.646 -15.469,55.021 -15.211,54.763 REG3.1
NetR3r_2: R3r.2 REG3.4 | length 2.8
  Top Layer w0.254: R3r.2 -17.847,54.296 -16.936,53.385 REG3.4
NetRESET_2: RESET.2 RS.1 | length 5.5
  Top Layer w0.3: RS.1 12.425,56.097 12.755,55.766 RESET.2@16.895,55.766
OSC0: 16MHz.1 Cx1.2 MICRO.40 | length 10.5
  Top Layer w0.25: MICRO.40 8.632,50.55 9.373,49.809 10.947,49.809 11.811,48.946 16MHz.1 11.924,48.147 Cx1.2
OSC1: 16MHz.3 Cx2.2 MICRO.41 | length 7
  Top Layer w0.225: MICRO.41 10.001,51.05 16MHz.3
  Top Layer w0.5: 16MHz.3@10.301,51.35 Cx2.2@10.301,53.594
PHA0: "G B A V.3" MICRO.28 | length 47.1
  Top Layer w0.203: MICRO.28 1.75,42.107 v1(1.982,41.875)
  Bottom Layer w0.203: v1(1.982,41.875) 2.861,41.875 3.404,42.418 3.404,43.358 4.47,44.425 6.604,44.425 13.719,37.309 13.719,31.925 21.742,23.901 21.742,15.021 20.666,13.945 20.422,13.945
PHA1: "V A B G.3" MICRO.15 | length 46.4
  Top Layer w0.25: -20.295,12.776 -20.149,12.63 -18.891,12.63 -16.84,14.681 v1(-16.84,42.672) ; v1(-13.589,42.723) -12.979,42.723 -10.947,44.755 -8.687,44.755 -7.442,45.999 -7.442,47.295 -7.187,47.55 MICRO.15
  Bottom Layer w0.25: v1(-16.84,42.672) -13.64,42.672 v1(-13.589,42.723)
PHB0: "G B A V.2" MICRO.29 | length 47.7
  Top Layer w0.203: MICRO.29 2.25,42.995 v1(2.497,42.748)
  Bottom Layer w0.203: v1(2.497,42.748) 2.497,43.442 4.191,45.136 6.553,45.136 14.251,37.438 14.251,32.358 22.174,24.435 22.174,14.427 20.422,12.675
PHB1: "V A B G.2" MICRO.14 | length 48.2
  Top Layer w0.25: -20.295,14.046 -21.057,14.046 -21.26,14.249 -21.26,15.723 -20.498,16.485 -20.498,43.307 -20.142,43.663 v1(-17.374,43.663) ; v1(-14.275,43.663) -12.94,43.663 -10.908,45.695 -8.89,45.695 -8.255,46.33 -8.255,47.727 -7.932,48.05 MICRO.14
  Bottom Layer w0.25: v1(-17.374,43.663) v1(-14.275,43.663)
S1: MICRO.21 RS1.2 S1.2 | length 39.2
  Top Layer w0.25: RS1.2@-13.268,38.075 RS1.2 -13.183,41.58 -10.82,43.942 -1.932,43.942 -1.75,44.124 MICRO.21
  Top Layer w0.5: RS1.2@-13.268,38.075 -14.427,38.075 -14.427,19.048 S1.2@-13.081,17.701
S2: MICRO.22 RS2.1 S2.2 | length 43.7
  Top Layer w0.25: RS2.1 -11.1,42.469 -10.08,43.489 -1.744,43.489 -1.25,43.983 MICRO.22
  Top Layer w0.5: RS2.1 -9.992,38.135 -9.627,37.77 -9.627,33.909 -11.252,32.283 -11.252,20.013 -8.585,17.346 S2.2
SCL: Gyro.4 MICRO.47 Rscl.2 | length 29.8
  Top Layer w0.203: MICRO.47 5.573,54.073 7.464,54.073 7.734,54.343 7.734,56.147 v1(7.722,56.159)
  Top Layer w0.508: Rscl.2 0.483,38.049 Gyro.4
  Bottom Layer w0.203: Gyro.4 -0.305,38.837 -0.305,42.088 4.902,47.295 4.902,50.47 7.722,53.289 v1(7.722,56.159)
SDA: Gyro.5 MICRO.48 Rsda.2 | length 29
  Top Layer w0.25: MICRO.48 6.569,54.55 7.061,55.042 v1(7.061,56.794)
  Top Layer w0.5: Rsda.2 -1.88,37.871 Gyro.5
  Bottom Layer w0.25: Gyro.5 -1.067,42.164 4.242,47.473 4.242,50.62 7.061,53.439 v1(7.061,56.794)
SLEEP: DRV.1 MICRO.13 | length 46.2
  Top Layer w0.25: v1(-9.271,46.787) -9.157,46.672 -9.157,48.55 MICRO.13 ; DRV.1 2.631,16.423 3.023,16.815 v1(3.023,18.085)
  Bottom Layer w0.25: v1(-9.271,46.787) -9.271,45.542 -12.954,41.859 -12.954,39.548 3.023,23.571 v1(3.023,18.085) v1@3.023,17.958
SRX: "TX  RX.2" MICRO.17 | length 26.7
  Top Layer w0.229: MICRO.17 -3.75,54.194
  Top Layer w0.25: -9.449,68.021 -11.303,66.167 -11.303,61.747 -3.75,54.194
STX: "TX  RX.1" MICRO.18 | length 22.8
  Top Layer w0.25: -9.449,65.481 -9.449,60.606 -3.25,54.407 MICRO.18
TCK: DEBUG.1 MICRO.52 | length 73.1
  Top Layer w0.203: 2.25,54.955 MICRO.52
  Top Layer w0.3: v1(-15.85,8.103) -15.875,8.103 -15.189,7.417 -13.517,7.417 DEBUG.1 ; v1(0.483,53.061) 0.483,53.264 2.235,55.016
  Bottom Layer w0.3: v1(-15.85,8.103) -15.85,8.89 -18.009,11.049 -18.009,32.078 -21.783,35.852 -21.783,44.257 -19.787,46.253 -13.512,46.253 -9.474,50.292 -1.626,50.292 -0.965,50.952 -0.965,51.664 0.457,53.086 v1(0.483,53.061)
TDI: DEBUG.3 MICRO.50 | length 77.3
  Top Layer w0.25: DEBUG.3 v1(-12.217,8.026) ; v1(3.226,58.598) 3.25,58.574 MICRO.50
  Bottom Layer w0.25: v1(-12.217,8.026) -12.217,8.174 -12.192,8.199 -12.857,8.865 -13.97,8.865 -16.789,11.684 -16.789,32.969 -20.58,36.76 -20.58,43.657 -19.152,45.085 -12.751,45.085 -8.788,49.047 -0.659,49.047 1.493,51.2 1.493,53.665 3.226,55.397 v1(3.226,58.598)
TDO: DEBUG.5 MICRO.49 | length 79
  Top Layer w0.25: -10.922,7.569 -10.643,7.849 -10.668,7.874 v1(-10.668,8.039) ; DEBUG.5 -10.917,7.548 ; MICRO.49 3.75,57.623 v1(4.674,58.547)
  Bottom Layer w0.25: v1(-10.668,8.039) -12.002,9.373 -13.741,9.373 -16.231,11.862 -16.231,33.503 -20.031,37.303 -20.031,43.469 -18.974,44.526 -12.471,44.526 -8.56,48.438 -0.253,48.438 2.362,51.053 2.362,53.619 4.674,55.931 v1(4.674,58.547)
TMS: DEBUG.2 MICRO.51 | length 72.4
  Top Layer w0.229: 2.75,53.816 MICRO.51
  Top Layer w0.3: v1(-13.411,8.128) -12.867,7.584 DEBUG.2 ; v1(0.533,51.384) 0.533,51.587 2.756,53.81 2.75,53.816
  Bottom Layer w0.3: v1(-13.411,8.128) -14.072,8.128 -17.348,11.405 -17.348,32.563 -21.158,36.373 -21.158,43.891 -19.38,45.669 -13.081,45.669 -9.144,49.606 -1.244,49.606 v1(0.533,51.384)
VCC: CCP.2 Cvm.1 DM.K DRV.12 J1.2 | length 22.1
  Top Layer w0.356: DRV.12 10.622,13.823 10.622,11.889 9.848,11.114 CCP.2 ; Cvm.1@12.104,15.304 Cvm.1@12.167,15.367
  Top Layer w0.4: Cvm.1@12.101,15.302 Cvm.1@12.104,15.304
  Top Layer w0.7: 10.622,13.823 Cvm.1@12.101,15.302
  Top Layer w1.143: 13.868,8.001 13.868,15.367
  Top Layer w1.2: Cvm.1@12.167,15.367 13.868,15.367 DM.K@16.618,15.367 ; 13.868,8.001 J1.2
VDD: Ci.1 D.K J1.1 REG3.10 REG3.11 REG3.12 REG3.13 | length 68.6
  Top Layer w0.508: D.K@8.636,8.179 D.K
  Top Layer w0.762: -15.164,46.634 Ci.1@-15.164,47.955
  Top Layer w1: -15.164,46.634 -15.734,46.065 -15.734,14.438 -15.164,13.868 -4.954,13.868 -0.799,9.714 2.427,9.714 3.302,10.589 6.225,10.589 D.K@8.636,8.179
  Top Layer w1.2: D.K 11.154,6.477 11.835,6.477 13.384,4.928 J1.1
WRX: MICRO.44 WIFI.8 | length 28.8
  Top Layer w0.254: v1@3.655,52.55 MICRO.44@5.121,52.55
  Top Layer w0.3: v1(3.632,52.527) v1@3.655,52.55
  Bottom Layer w0.3: WIFI.8 -3.81,62.992 -6.147,60.655 -6.147,59.766 -4.369,57.988 -3.708,57.988 -2.184,59.512 5.08,59.512 5.639,58.953 5.639,54.813 3.563,52.738 3.632,52.738 v1(3.632,52.527)
WTX: MICRO.43 WIFI.1 | length 25.5
  Top Layer w0.254: MICRO.43 7.6,52.05
  Top Layer w0.3: 7.6,52.05 v1(8.23,52.68) ; v1(9.982,67.64) 9.982,66.573 10.058,66.497 v1(10.058,61.239)
  Bottom Layer w0.3: WIFI.1 4.166,68.224 4.75,67.64 v1(9.982,67.64) ; v1(8.23,52.68) 8.636,52.68 10.058,54.102 v1(10.058,61.239)
pads on no net: "LED ON.0" "OFF ON.1" "OFF ON.GND" C1.0 C2.0 C3.0 C4.0 C5.0 C6.0 C7.0 C8.0 C9.0 CCP.0 Ci.0 CNT.0 CO.0 CP.0 CRST.0 CSS.0 CVC.0 Cvm.0 Cx1.0 Cx2.0 DEBUG.0 DEBUG.4 DEBUG.SH DRV.8 IR1.0 IR2.0 IR3.0 IR4.0 IR5.0 IR6.0 IR11.0 IR22.0 IR33.0 IR44.0 IR55.0 IR66.0 L1.0 L2.0 LR.0 MICRO.0 MICRO.1 MICRO.4 MICRO.5 MICRO.6 MICRO.10 MICRO.16 MICRO.32 MICRO.33 MICRO.34 MICRO.36 MICRO.37 MICRO.46 R3.3.0 R3r.0 RL1.0 RL2.0 Rrst.0 RS1.0 RS2.0 RS.0 Rscl.0 Rsda.0 ULN.0 ULN.7 ULN.9 ULN.10 WIFI.4 WIFI.5 WIFI.6

## Polygon pours and split planes (outlines as drawn)
GND on Bottom Layer "GND BOT" (solid, pour order 12): -39.015,53.229 -35.932,63.475 -29.658,73.406 -21.708,80.366 -14.545,84.099 -7.789,86.106 -0.346,86.843 5.978,86.487 12.023,85.065 18.221,82.677 23.707,79.096 28.686,74.625 32.826,69.342 36.128,63.195 38.897,53.569 28.203,53.442 28.085,53.324 28.085,0.229 -27.915,0.229 -27.915,53.229
GND on Top Layer "GND TOP" (solid, pour order 10): -38.656,53.34 -35.675,63.861 -29.54,73.296 -21.869,80.104 -14.046,84.142 -7.544,86.073 -1.499,86.657 6.045,86.327 10.973,85.311 17.297,82.872 23.774,78.707 29.54,73.296 33.045,68.318 34.621,65.829 35.687,63.39 37.363,59.555 38.765,53.34 27.788,53.34 28.059,0.127 -27.991,0.127 -27.991,53.34
VDD on Top Layer "VINREG" (solid, pour order 8): -16.332,50.851 -16.307,50.825 -15.062,50.825 -14.884,50.825 -14.884,51.359 -14.122,51.359 -14.122,50.597 -14.289,49.619 -14.691,46.573 -15.291,48.971 -16.307,50.063 -16.332,50.089
3.3V on Top Layer "VOUTREG" (solid, pour order 11): -14.91,52.527 -11.608,52.578 -11.379,52.807 -11.328,52.857 -11.328,56.388 -11.328,56.439 -11.633,56.744 -11.709,56.82 -13.88,56.82 -13.88,55.007 -14.097,54.534 -14.91,52.857
NetLR_1 on Top Layer "SW" (solid, pour order 13): -15.088,53.035 -15.088,54.815 -15.28,55.007 -15.215,55.072 -15.215,56.82 -16.383,56.82 -16.535,56.667 -16.535,55.296 -16.535,55.042 -15.926,54.432 -15.9,54.407 -15.9,52.984 -15.138,52.984

## Silkscreen, mask and mechanical layers (free items; w line width, h text height)
Top Overlay:
  text "Shank 2.0" at -20.168,27 h10
  text "CITE USB" at -9.925,21.49 h6
  text "TCK TMS TDI TDO" at -16.688,8.661 h1.2
  text "+" at 19.558,0.051 h1.5
  text "-" at 16.637,-0.051 h1.5
Mechanical 1:
  circle w0.2: c25,3 r1.4
  circle w0.2: c-25,3 r1.4
  circle w0.2: c25,50 r1.4
  circle w0.2: c-25,50 r1.4
  lines w0.2: -16.097,0 -16.097,4.494 -15.569,5.022 -9.013,5.022 -8.338,4.347 ; -8.338,0.025 -8.338,4.319
  lines w0.254: -39.228,53.018 cw(c-0.102,47.6) 39.029,52.99 ; -39.1,53 -28,53 -28,0 28,0 28,53 ; -28,50.25 -28,53.004 ; 22,0.007 28,0.007 28,2.75 ; 27.979,53.021 28,53 ; 28,50.25 28,53 ; 39.1,53 28,53

## Text inside footprints (layer, text, board x,y; h text height)
Gyro: Top Overlay "GYRO" at -3.48,37.694 h1.5 r180